# Altium PCB PCBROUTAGE.PcbDoc
Units mil, origin at the board's own origin, x right, y up, seen from the top; angles counter-clockwise.
Board outline 8785 x 6585 mil, 2 copper layers (Top Layer, Bottom Layer); 193 components, 168 nets, 704 pads, 0 vias.
Unrouted connection lines stored in the file: 371.
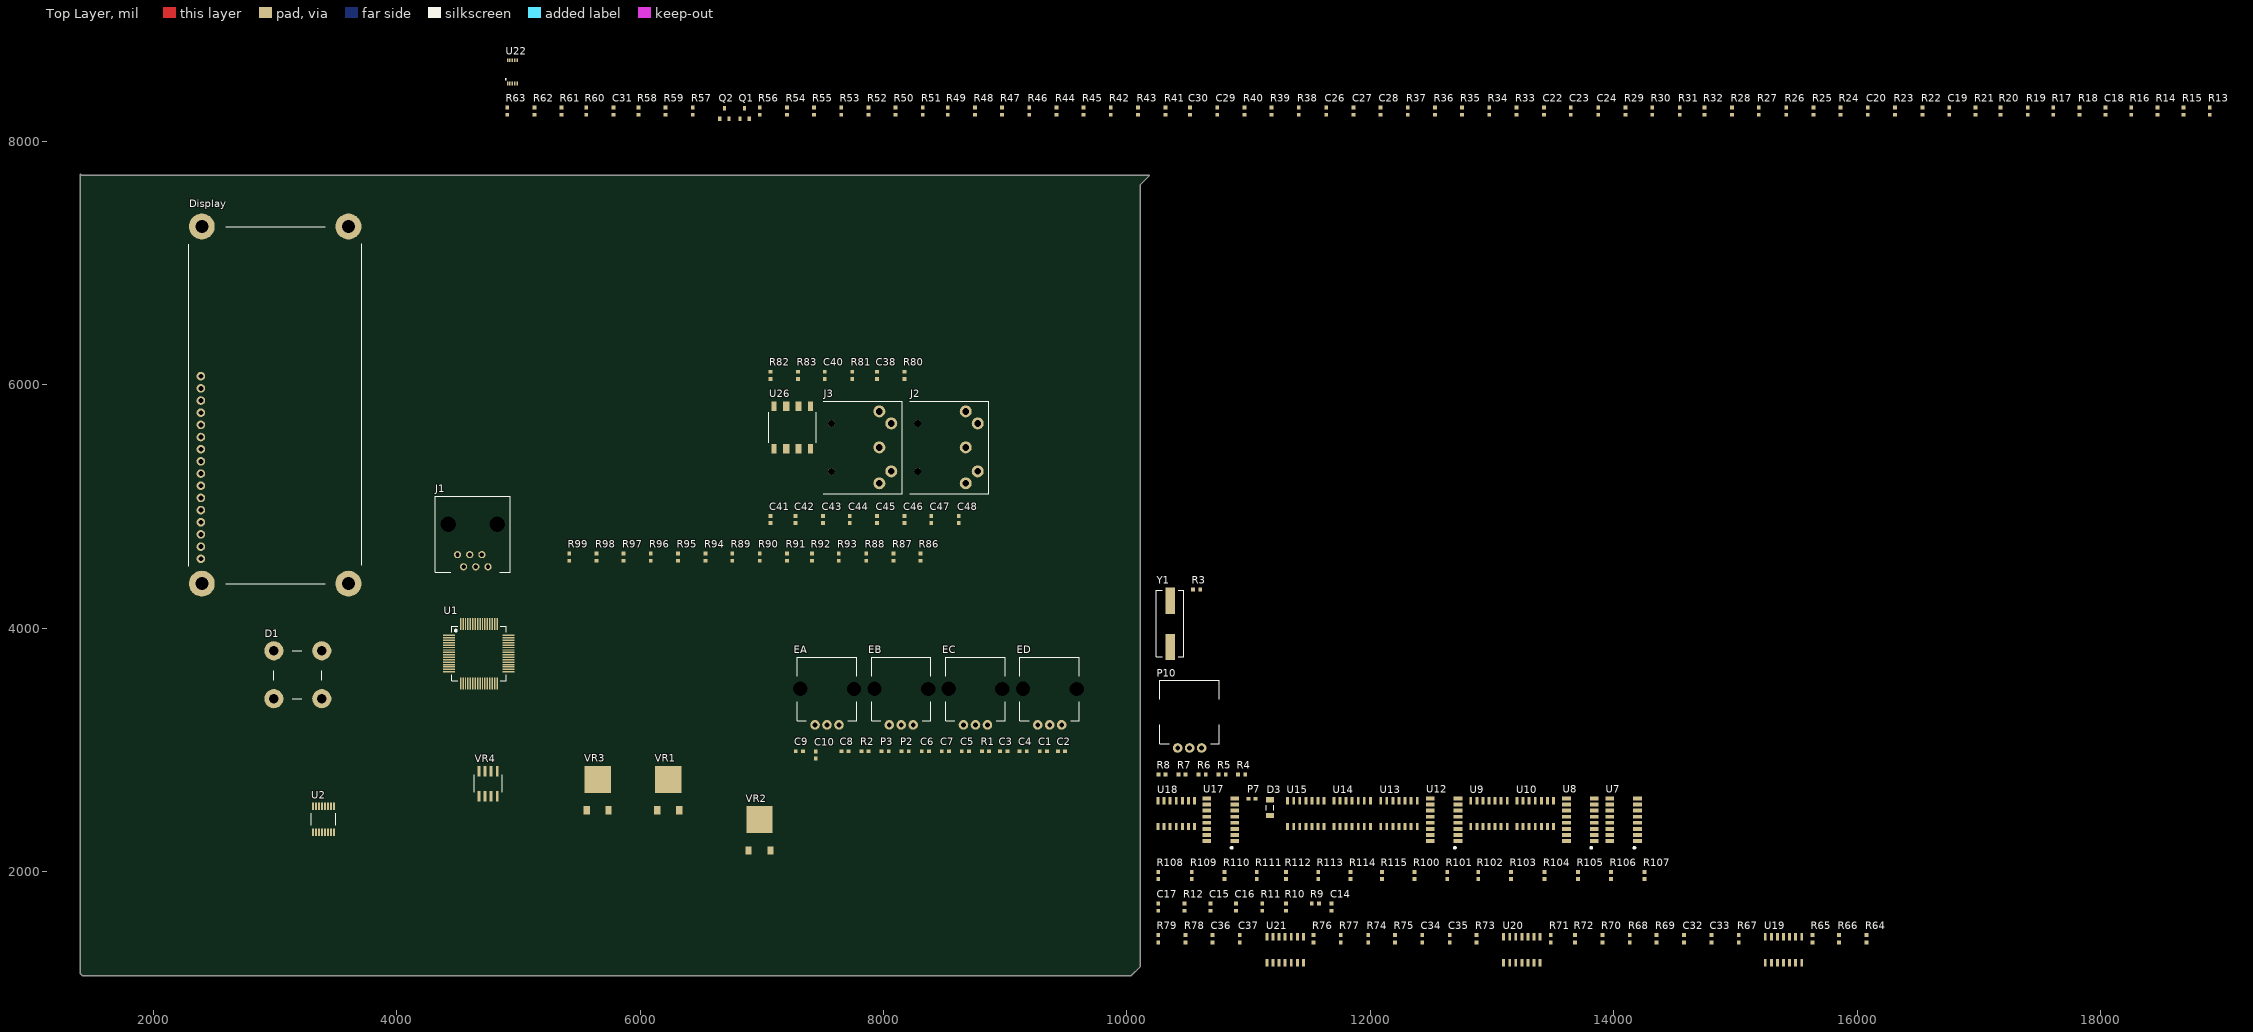
[diagram p0: Top Layer view]
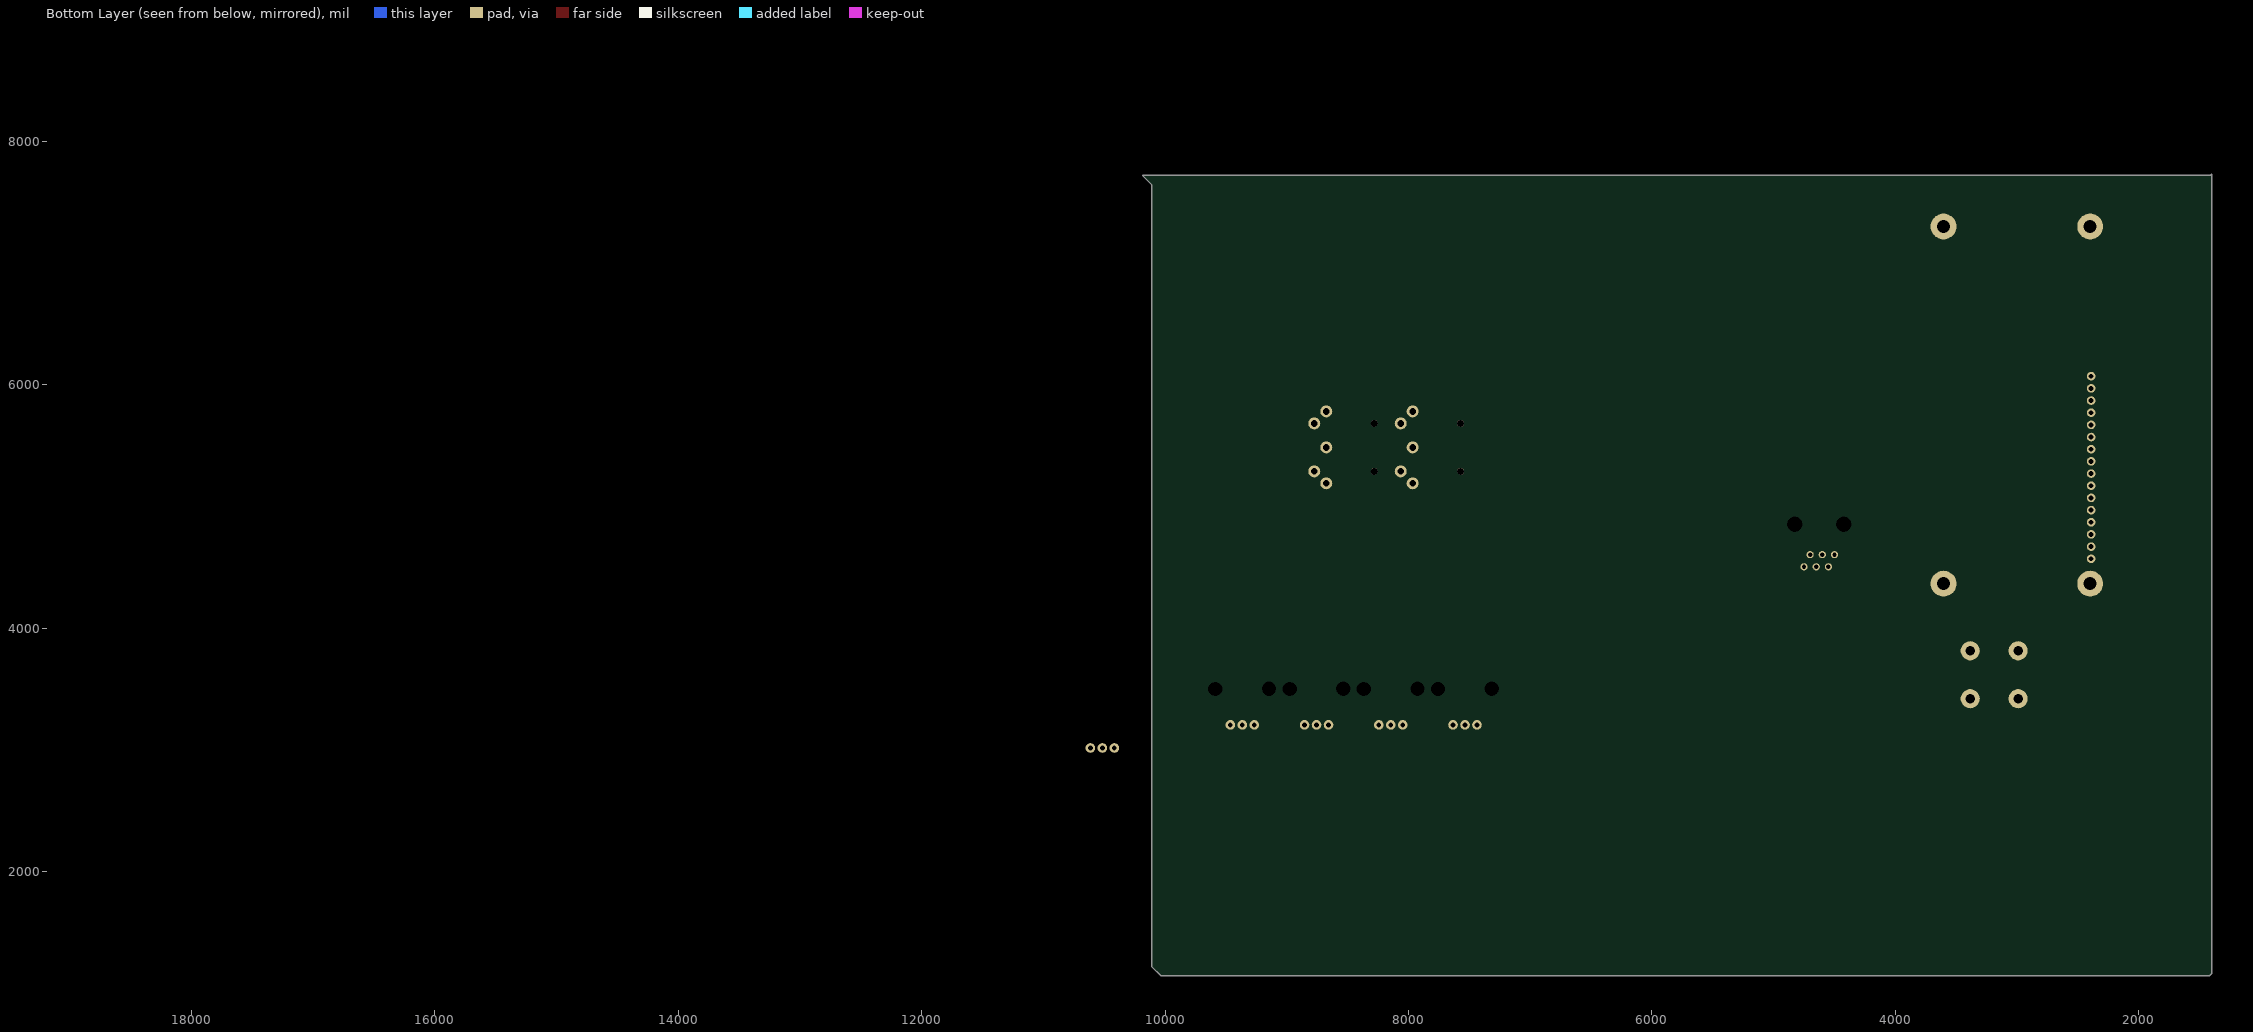
[diagram p1: Bottom Layer view, seen from below]

## Layer stack, top to bottom
Top Solder: solder mask 0.4, Solder Resist, Dk 3.5
Top Layer: signal copper 1.4
Dielectric 1: dielectric 12.6, FR-4, Dk 4.8
Bottom Layer: signal copper 1.4
Bottom Solder: solder mask 0.4, Solder Resist, Dk 3.5

## Board outline
1400,1160 1400,7730 1410,7720 10185,7720 10110,7645 10110,1220 10035,1145 1415,1145

## Design rules (kind name [scope] priority, off if disabled: settings)
Clearance [All] p1: gap=10
PolygonConnect [All] p1: connectstyle=Relief reliefconductorwidth=10 reliefentries=4 polygonreliefangle="90 Angle" airgapwidth=10
RoutingVias [All] p1: holewidth=28 width=50 viastyle="Through Hole" minholewidth=28 minwidth=50 maxholewidth=28 maxwidth=50
SolderMaskExpansion [All] p1: expansion=4
UnpouredPolygon [All] p1: allowunpoured=FALSE
Width [All] p1: maxlimit=10 minlimit=10 preferedwidth=10
29 further rules are at their usual default settings.

## Classes and differential pairs
component class Alimentation: C1 C2 C3 C4 C5 C6 C7 C8 C9 C10 D1 P1 P2 P3 R1 R2 VR1 VR2 VR3 VR4
component class Multiplexeur: C38 C39 C40 J4 P9 P10 R80 R81 R82 R83 R84 R85 U22 U23 U24 U25
component class Filtres: C18 C19 C20 C21 C22 C23 C24 C25 C26 C27 C28 C29 C30 C31 D3 P4 P5 P6 P7 Q1 Q2 Q3 Q4 R13 R14 R15 R16 R17 R18 R19 R20 R21 R22 R23 R24 R25 R26 R27 R28 R29 R30 R31 R32 R33 R34 R35 R36 R37 R38 R39 R40 R41 R42 R43 R44 R45 R46 R47 R48 R49 R50 R51 R52 R53 R54 R55 R56 R57 R58 R59 R60 R61 R62 R63 U3 U4 U5 U6 U7 U8 U9 U10 U11 U12 U13 U14 U15 U16 U17 U18
component class Encodeurs: C41 C42 C43 C44 C45 C46 C47 C48 EA EB EC ED R100 R101 R102 R103 R104 R105 R106 R107 R108 R109 R110 R111 R112 R113 R114 R115
component class Display: D4 D5 D6 D7 D8 D9 D10 D11 D12 Display P11 R86 R87 R88 R89 R90 R91 R92 R93 R94 R95 R96 R97 R98 R99 S2 S3 S4 S5 S6
component class DAC: C14 C15 C16 C17 R9 R10 R11 R12 U2
component class "Controle du Filtre": C32 C33 C34 C35 C36 C37 P8 R64 R65 R66 R67 R68 R69 R70 R71 R72 R73 R74 R75 R76 R77 R78 R79 U19 U20 U21
component class "MIDI IN": J2 J3 R4 R5 R6 R7 R8 U26
component class PIC: J1 R3 U1 Y1

## Components (designator, comment, footprint, x,y, rotation, side; value= is the part's Value field where it differs from the comment)
C1 "10uF" CAPC1608N 9250,2980 r0 top
C2 "100uF" CAPC1608N 9400,2980 r0 top
C3 "10uF" CAPC1608N 8925,2980 r0 top
C4 "100uF" CAPC1608N 9085,2980 r0 top
C5 "2200uF" CAPC1608N 8610,2980 r0 top
C6 "10uF" CAPC1608N 8280,2980 r0 top
C7 "100uF" CAPC1608N 8445,2980 r0 top
C8 "2200uF" CAPC1608N 7620,2980 r0 top
C9 "10uF" CAPC1608N 7245,2980 r0 top
C10 "100uF" CAPC1608N 7450,2895 r90 top
C14 "10uF" CAPC1608N 11690,1645 r90 top
C15 "10uF" CAPC1608N 10695,1645 r90 top
C16 "10uF" CAPC1608N 10905,1645 r90 top
C17 "0.1uF" CAPC1608N 10265,1645 r90 top
C18 "0.1uF" CAPC1608N 18050,8185 r90 top
C19 "0.1uF" CAPC1608N 16765,8185 r90 top
C20 "22pF" CAPC1608N 16095,8185 r90 top
C22 "0.1uF" CAPC1608N 13435,8185 r90 top
C23 "0.1uF" CAPC1608N 13655,8185 r90 top
C24 "0.1uF" CAPC1608N 13880,8185 r90 top
C26 "0.1uF" CAPC1608N 11645,8185 r90 top
C27 "0.1uF" CAPC1608N 11870,8185 r90 top
C28 "0.1uF" CAPC1608N 12090,8185 r90 top
C29 "220pF" CAPC1608N 10750,8185 r90 top
C30 "220pF" CAPC1608N 10525,8185 r90 top
C31 "100pF" CAPC1608N 5790,8185 r90 top
C32 "10uF" CAPC1608N 14585,1385 r90 top
C33 "10uF" CAPC1608N 14810,1385 r90 top
C34 "10uF" CAPC1608N 12435,1385 r90 top
C35 "10uF" CAPC1608N 12660,1385 r90 top
C36 "10uF" CAPC1608N 10710,1385 r90 top
C37 "10uF" CAPC1608N 10935,1385 r90 top
C38 "47pF" CAPC1608N 7955,6015 r90 top
C40 "4.7uF" CAPC1608N 7525,6015 r90 top
C41 "Cap" CAPC1608N 7080,4830 r90 top
C42 "Cap" CAPC1608N 7285,4830 r90 top
C43 "Cap" CAPC1608N 7510,4830 r90 top
C44 "Cap" CAPC1608N 7730,4830 r90 top
C45 "Cap" CAPC1608N 7955,4830 r90 top
C46 "Cap" CAPC1608N 8180,4830 r90 top
C47 "Cap" CAPC1608N 8400,4830 r90 top
C48 "Cap" CAPC1608N 8625,4830 r90 top
D1 "4x 1N4001" 1N4001 2990,3420 r0 top
D3 "1N914" 1N914 11310,2495 r90 top
Display "16x2 LCD" Display 2290,4260 r90 top
EA "EC12E" EC12E 7535,3205 r0 top
EB "EC12E" EC12E 8145,3205 r0 top
EC "EC12E" EC12E 8755,3205 r0 top
ED "EC12E" EC12E 9365,3205 r0 top
J1 "Program/Debug" RJ11 4195,4320 r0 top
J2 "Midi IN" "PCB DIN Socket" 8765,5105 r90 top
J3 "Midi THRU" "PCB DIN Socket" 8055,5105 r90 top
P2 "1k" CAPC1608N 8115,2980 r0 top
P3 "1k" CAPC1608N 7950,2980 r0 top
P7 "Hi freq Compensate" CAPC1608N 10965,2590 r0 top
P10 "Volume" EC12E 10515,3015 r0 top
Q1 "2N3906" 2N3906 6720,8125 r0 top
Q2 "2N3906" 2N3906 6555,8125 r0 top
R1 "120" CAPC1608N 8775,2980 r0 top
R2 "240" CAPC1608N 7785,2980 r0 top
R3 "10k" CAPC1608N 10510,4310 r0 top
R4 "Res1" CAPC1608N 10880,2790 r0 top
R5 "Res1" CAPC1608N 10720,2790 r0 top
R6 "330" CAPC1608N 10555,2790 r0 top
R7 "Res1" CAPC1608N 10390,2790 r0 top
R8 "1k" CAPC1608N 10225,2790 r0 top
R9 "100" CAPC1608N 11485,1730 r0 top
R10 "100" CAPC1608N 11315,1645 r90 top
R11 "100" CAPC1608N 11120,1645 r90 top
R12 "100" CAPC1608N 10480,1645 r90 top
R13 "300k" CAPC1608N 18905,8185 r90 top
R14 "2k" CAPC1608N 18475,8185 r90 top
R15 "2k" CAPC1608N 18690,8185 r90 top
R16 "200k" CAPC1608N 18260,8185 r90 top
R17 "100k" CAPC1608N 17620,8185 r90 top
R18 "100k" CAPC1608N 17835,8185 r90 top
R19 "49.9k" CAPC1608N 17410,8185 r90 top
R20 "150k" CAPC1608N 17185,8185 r90 top
R21 "4.7M" CAPC1608N 16980,8185 r90 top
R22 "2k" CAPC1608N 16545,8185 r90 top
R23 "180k" CAPC1608N 16320,8185 r90 top
R24 "4.7M" CAPC1608N 15870,8185 r90 top
R25 "150k" CAPC1608N 15650,8185 r90 top
R26 "39k" CAPC1608N 15425,8185 r90 top
R27 "300k" CAPC1608N 15200,8185 r90 top
R28 "49.9k" CAPC1608N 14980,8185 r90 top
R29 "39k" CAPC1608N 14105,8185 r90 top
R30 "100" CAPC1608N 14325,8185 r90 top
R31 "100" CAPC1608N 14550,8185 r90 top
R32 "43k" CAPC1608N 14755,8185 r90 top
R33 "150k" CAPC1608N 13210,8185 r90 top
R34 "30k" CAPC1608N 12985,8185 r90 top
R35 "100k" CAPC1608N 12760,8185 r90 top
R36 "100k" CAPC1608N 12540,8185 r90 top
R37 "20k" CAPC1608N 12315,8185 r90 top
R38 "20k" CAPC1608N 11420,8185 r90 top
R39 "4.7k" CAPC1608N 11195,8185 r90 top
R40 "100" CAPC1608N 10975,8185 r90 top
R41 "30k" CAPC1608N 10325,8185 r90 top
R42 "50k" CAPC1608N 9875,8185 r90 top
R43 "50k" CAPC1608N 10100,8185 r90 top
R44 "100k" CAPC1608N 9430,8185 r90 top
R45 "120k" CAPC1608N 9650,8185 r90 top
R46 "30k" CAPC1608N 9205,8185 r90 top
R47 "100k" CAPC1608N 8980,8185 r90 top
R48 "100k" CAPC1608N 8760,8185 r90 top
R49 "100k" CAPC1608N 8535,8185 r90 top
R50 "7.5k" CAPC1608N 8105,8185 r90 top
R51 "7.5k" CAPC1608N 8330,8185 r90 top
R52 "2k" CAPC1608N 7885,8185 r90 top
R53 "100k" CAPC1608N 7660,8185 r90 top
R54 "100k" CAPC1608N 7215,8185 r90 top
R55 "30k" CAPC1608N 7435,8185 r90 top
R56 "1M" CAPC1608N 6990,8185 r90 top
R57 "100k" CAPC1608N 6440,8185 r90 top
R58 "33k" CAPC1608N 5995,8185 r90 top
R59 "33k" CAPC1608N 6215,8185 r90 top
R60 "10k" CAPC1608N 5565,8185 r90 top
R61 "100k" CAPC1608N 5360,8185 r90 top
R62 "475" CAPC1608N 5140,8185 r90 top
R63 "10k" CAPC1608N 4915,8185 r90 top
R64 "18K" CAPC1608N 16085,1385 r90 top
R65 "2k" CAPC1608N 15640,1385 r90 top
R66 "2k" CAPC1608N 15860,1385 r90 top
R67 "3.3k" CAPC1608N 15035,1385 r90 top
R68 "10k" CAPC1608N 14140,1385 r90 top
R69 "10k" CAPC1608N 14360,1385 r90 top
R70 "18K" CAPC1608N 13915,1385 r90 top
R71 "2k" CAPC1608N 13490,1385 r90 top
R72 "2k" CAPC1608N 13690,1385 r90 top
R73 "3.3k" CAPC1608N 12880,1385 r90 top
R74 "10k" CAPC1608N 11990,1385 r90 top
R75 "10k" CAPC1608N 12210,1385 r90 top
R76 "2k" CAPC1608N 11540,1385 r90 top
R77 "2k" CAPC1608N 11765,1385 r90 top
R78 "10k" CAPC1608N 10490,1385 r90 top
R79 "10k" CAPC1608N 10265,1385 r90 top
R80 "50k" CAPC1608N 8180,6015 r90 top
R81 "10k" CAPC1608N 7750,6015 r90 top
R82 "330" CAPC1608N 7080,6015 r90 top
R83 "5k" CAPC1608N 7305,6015 r90 top
R86 "220" CAPC1608N 8310,4520 r90 top
R87 "220" CAPC1608N 8090,4520 r90 top
R88 "220" CAPC1608N 7865,4520 r90 top
R89 "10K" CAPC1608N 6765,4520 r90 top
R90 "10K" CAPC1608N 6990,4520 r90 top
R91 "10K" CAPC1608N 7215,4520 r90 top
R92 "10K" CAPC1608N 7420,4520 r90 top
R93 "10K" CAPC1608N 7640,4520 r90 top
R94 "220" CAPC1608N 6545,4520 r90 top
R95 "220" CAPC1608N 6320,4520 r90 top
R96 "220" CAPC1608N 6095,4520 r90 top
R97 "220" CAPC1608N 5870,4520 r90 top
R98 "220" CAPC1608N 5650,4520 r90 top
R99 "220" CAPC1608N 5425,4520 r90 top
R100 "10K" CAPC1608N 12370,1905 r90 top
R101 "10K" CAPC1608N 12640,1905 r90 top
R102 "10K" CAPC1608N 12895,1905 r90 top
R103 "10K" CAPC1608N 13165,1905 r90 top
R104 "10K" CAPC1608N 13440,1905 r90 top
R105 "10K" CAPC1608N 13715,1905 r90 top
R106 "10K" CAPC1608N 13985,1905 r90 top
R107 "10K" CAPC1608N 14260,1905 r90 top
R108 "330" CAPC1608N 10265,1905 r90 top
R109 "330" CAPC1608N 10540,1905 r90 top
R110 "330" CAPC1608N 10810,1905 r90 top
R111 "330" CAPC1608N 11075,1905 r90 top
R112 "330" CAPC1608N 11315,1905 r90 top
R113 "330" CAPC1608N 11580,1905 r90 top
R114 "330" CAPC1608N 11845,1905 r90 top
R115 "330" CAPC1608N 12105,1905 r90 top
U1 "PIC32MX575F512H" PIC32 4310,3810 r0 top
U2 "PCM1781" PCM1781 3415,2480 r0 top
U7 "LM13700" LM13700 14220,2175 r90 top
U8 "LM13700" LM13700 13865,2175 r90 top
U9 "TL082" TL084 12890,2330 r0 top
U10 "TL082" TL084 13270,2330 r0 top
U12 "LM13700" LM13700 12745,2175 r90 top
U13 "TL082" TL084 12150,2330 r0 top
U14 "TL082" TL084 11765,2330 r0 top
U15 "TL082" TL084 11385,2330 r0 top
U17 "LM13700" LM13700 10910,2175 r90 top
U18 "TL082" TL084 10320,2330 r0 top
U19 "TL084" TL084 15310,1210 r0 top
U20 "TL084" TL084 13160,1210 r0 top
U21 "TL084" TL084 11215,1210 r0 top
U22 "ADG704" ADG704 4845,8410 r0 top
U26 "6N139" 6N139 7055,5415 r0 top
VR1 "LM1117-3.3" LM1117 6110,2880 r0 top
VR2 "LM1117-5.0" LM1117 6860,2550 r0 top
VR3 "LM1117-ADJ" LM1117 5530,2880 r0 top
VR4 "LM337L" LM337L 4615,2525 r0 top
Y1 "12.288 MHz" "HC49/4H SMX CRYSTAL" 10355,4035 r90 top

## Footprints (in the part's own frame and the unit in brackets; to place one, negate y for a bottom-side part, rotate by r counter-clockwise, add the part's x,y. Pads: shape width x height; smd on the part's side, far side on the other; paste and mask are expansions set on the pad)
1N914 [mm] "Diode"
  rect 1.1x1.65 smd: 1(-0.889,3.396) 2(2.411,3.396)
  silkscreen extent 0.25,2.67 1.27,4.19
1N4001 [mm] "Diode"
  round 4 hole 2: 1(0,10) 2(10,10) 3(10,0) 4(0,0)
  silkscreen extent 0,0 10,10
2N3906 [mm]
  rect 0.7x1 smd: 1(2.54,1.524) 1(3.485,3.74) 1(4.44,1.524)
6N139 [mil] "Optocoupleur"
  rect 40x78.74 smd: 1(45,60) 4(345,60) 5(345,409.13) 8(45,409.13)
  rect 50x78.74 smd: 2(145,60) 3(245,60) 6(245,409.13) 7(145,409.13)
  silkscreen extent 0,110 390,360
ADG704 [mm] "Multiplexeur"
  rect 0.3x0.8 smd mask+0.05: 1(1.651,1.651) 2(2.151,1.651) 3(2.659,1.651) 4(3.159,1.651) 5(3.675,1.651) 6(3.675,6.498) 7(3.159,6.498) 8(2.659,6.498) 9(2.151,6.498) 10(1.651,6.498)
  silkscreen extent 1.17,2.44 1.37,2.64
CAPC1608N [mil]
  rect 31.5x31.5 smd: 1(33,8) 2(92,8)
Display [mm]
  round 5.4 hole 2.7: 0(2.674,-2.733) 0(2.674,-33.34) 0(77.223,-33.34) 0(77.223,-2.733)
  round 1.8 hole 1: 1(7.874,-2.54) 2(10.414,-2.54) 3(12.954,-2.54) 4(15.494,-2.54) 5(18.034,-2.54) 6(20.574,-2.54) 7(23.114,-2.54) 8(25.654,-2.54) 9(28.194,-2.54) 10(30.734,-2.54) 11(33.274,-2.54) 12(35.814,-2.54) 13(38.354,-2.54) 14(40.894,-2.54) 15(43.434,-2.54) 16(45.974,-2.54)
  silkscreen extent 2.67,-36.13 77.22,0
EC12E [mm] "Encodeur"
  round 0 hole 3 mask+0: 0(-5.584,7.5) 0(5.628,7.493)
  round 2 hole 1 mask+0: A(-2.5,0) B(0,0) C(2.5,0)
  silkscreen extent -6.2,0.89 6.2,14.09
"HC49/4H SMX CRYSTAL" [mm]
  rect 5.5x2 smd: 1(-4.826,0) 2(4.826,0)
  silkscreen extent -6.86,-2.86 7.04,2.94
LM337L [mm]
  round 0.4 on Top Overlay: 0(1.27,4.064)
  rect 0.6x2.2 smd mask+0.1: 1(1.524,2.413) 2(2.794,2.413) 3(4.064,2.413) 4(5.334,2.413) 5(5.334,7.613) 6(4.064,7.613) 7(2.794,7.613) 8(1.524,7.613)
  silkscreen extent 0.51,3.17 6.35,6.86
LM1117 [mm] "Linear regulator"
  rect 1.3x1.7 smd: 1(0.764,-9.57) 3(5.334,-9.57)
  rect 5.5x5.7 smd: 2(3.049,-3.13)
LM13700 [mm]
  rect 0.8x1.8 smd: 1(1.905,0.635) 2(3.175,0.635) 3(4.445,0.635) 4(5.715,0.635) 5(6.985,0.635) 6(8.255,0.635) 7(9.525,0.635) 8(10.795,0.635) 9(10.795,6.435) 10(9.525,6.435) 11(8.255,6.435) 12(6.985,6.435) 13(5.715,6.435) 14(4.445,6.435) 15(3.175,6.435) 16(1.905,6.435)
  silkscreen extent 0.31,1.07 0.71,1.47
"PCB DIN Socket" [mm] "Midi"
  round 1.4 hole 1.5 mask+0: 0(4.652,12.286) 0(14.652,12.286)
  round 2.5 hole 1.4: 1(9.652,2.286) 2(17.159,2.286) 3(2.159,2.286) 4(14.652,-0.214) 5(4.652,-0.214)
  silkscreen extent 0,-2.54 19.3,13.97
PCM1781 [mm] "DAC"
  rect 0.4x1.6 smd mask+0.05: 1(-2.667,-4.003) 2(-2.032,-4.003) 3(-1.397,-4.003) 4(-0.762,-4.003) 5(-0.127,-4.003) 6(0.508,-4.003) 7(1.143,-4.003) 8(1.778,-4.003) 9(1.778,1.397) 10(1.143,1.397) 11(0.508,1.397) 12(-0.127,1.397) 13(-0.762,1.397) 14(-1.397,1.397) 15(-2.032,1.397) 16(-2.667,1.397)
  round 0.4 on Top Overlay: 1(-2.413,-2.286)
  silkscreen extent -3.05,-2.54 2.16,0
PIC32 [mm] "PIC32MX575F512H"
  rect 2.5x0.3 smd paste+0 mask+0.05: 1(3.056,3.302) 2(3.056,2.802) 3(3.056,2.294) 4(3.056,1.794) 5(3.056,1.278) 6(3.056,0.778) 7(3.056,0.262) 8(3.056,-0.238) 9(3.056,-0.754) 10(3.056,-1.254) 11(3.056,-1.762) 12(3.056,-2.262) 13(3.056,-2.778) 14(3.056,-3.278) 15(3.056,-3.794) 16(3.056,-4.294) 33(15.456,-4.294) 34(15.456,-3.794) 35(15.456,-3.278) 36(15.456,-2.778) 37(15.456,-2.262) 38(15.456,-1.762) 39(15.456,-1.254) 40(15.456,-0.754) 41(15.456,-0.238) 42(15.456,0.262) 43(15.456,0.778) 44(15.456,1.278) 45(15.456,1.794) 46(15.456,2.294) 47(15.456,2.802) 48(15.456,3.302)
  rect 0.3x2.5 smd paste+0 mask+0.05: 17(5.461,-6.693) 18(5.961,-6.693) 19(6.469,-6.693) 20(6.969,-6.693) 21(7.485,-6.693) 22(7.985,-6.693) 23(8.501,-6.693) 24(9.001,-6.693) 25(9.517,-6.693) 26(10.017,-6.693) 27(10.525,-6.693) 28(11.025,-6.693) 29(11.541,-6.693) 30(12.041,-6.693) 31(12.557,-6.693) 32(13.057,-6.693) 49(13.057,5.707) 50(12.557,5.707) 51(12.041,5.707) 52(11.541,5.707) 53(11.025,5.707) 54(10.525,5.707) 55(10.017,5.707) 56(9.517,5.707) 57(9.001,5.707) 58(8.501,5.707) 59(7.985,5.707) 60(7.485,5.707) 61(6.969,5.707) 62(6.469,5.707) 63(5.961,5.707) 64(5.461,5.707)
  silkscreen extent 3.56,-6.19 14.96,5.21
RJ11 [mm] "RJ11 Socket"
  round 0 hole 3.25 mask+0: 0(5.818,13.556) 0(15.978,13.556)
  round 1.5 hole 0.9: 1(14.073,4.666) 2(12.803,7.206) 3(11.533,4.666) 4(10.263,7.206) 5(8.993,4.666) 6(7.723,7.206)
  silkscreen extent 3.05,3.56 18.75,19.44
TL084 [mm] "Ampli-op"
  rect 0.6x1.55 smd: 1(-1.651,1.016) 1(-1.651,6.416) 1(2.159,1.016) 1(2.159,6.416) 2(-0.381,1.016) 2(-0.381,6.416) 2(3.429,1.016) 2(3.429,6.416) 3(0.889,1.016) 3(0.889,6.416) 3(4.699,1.016) 3(4.699,6.416) 4(5.969,1.016) 4(5.969,6.416)

## Part data
C1 C2 C3 C4 C6 C7 C9 C10: library part Cap2, "Capacitor"
C5 C8 C14 C15 C16: library part "Cap Pol1", "Polarized Capacitor (Radial)"
C17 C18 C19 C20 C22 C23 C24 C26 C27 C28 C29 C30 C31 C32 C33 C34 C35 C36 C37 C38 C40: library part "Cap Semi", "Capacitor (Semiconductor SIM Model)"
C41 C42 C43 C44 C45 C46 C47 C48: "Capacitor"
D1: library part Bridge1, "Full Wave Diode Bridge"
D3: library part "Diode 1N4001", "1 Amp General Purpose Rectifier"
Display: library part Display
J1: library part "Header 6H", "Header, 6-Pin, Right Angle"
J2 J3: library part "Header 5", "DIN 5 Pins"
P2 P3 P7: library part "Res Adj1", "Variable Resistor"
P10: library part RPot, "Potentiometer"
Q1 Q2: "PNP General Purpose Amplifier"
R1 R2 R9 R10 R11 R12 R13 R14 R15 R16 R17 R18 R19 R20 R21 R22 R23 R24 R25 R26 R27 R28 R29 R30 R31 R32 R33 R34 R35 R36 R37 R38 R39 R40 R41 R42 R43 R44 R45 R46 R47 R48 R49 R50 R51 R52 R53 R54 R55 R56 R57 R58 R59 R60 R61 R62 R63 R64 R65 R66 R67 R68 R69 R70 R71 R72 R73 R74 R75 R76 R77 R78 R79 R80 R81 R82 R83: library part Res3, "Resistor"
R3 R6 R8 R86 R87 R88 R89 R90 R91 R92 R93 R94 R95 R96 R97 R98 R99 R100 R101 R102 R103 R104 R105 R106 R107 R108 R109 R110 R111 R112 R113 R114 R115: library part Res1, "Resistor"
R4 R5 R7: "Resistor"
U1: library part "PIC32 MX575F512H"
U2: library part "PCM1781 DAC"
VR1 VR2 VR3 VR4: library part "Volt Reg", "Voltage Regulator"
Y1: library part XTAL, "Crystal Oscillator"

## Nets (pads, with @x,y where several pads share a name; then routed paths per layer and width w, separated by ;. In a path a pad name is that pad's centre, name@x,y a point inside that pad or via, vN(x,y) a via of type N, cw(c..) or ccw(c..) an arc to the next point about the centre after c; other vN are vias at no path point)
3,3V: J1.2 R3.2 U1.10 U1.19 U1.26 U1.38 U1.57
+3.3V: C2.1 R89.2 R90.2 R91.2 R92.2 R93.2 VR1.3
+5V: C4.1 C16.1 C17.2 Display.2 Display.16 R4.2 R6.2 U2.11 U22.5 U22.6 VR2.3
+9V: C7.1 C22.2 C23.2 C24.2 R1.2 R37.1 R38.1 R43.2 R56.1 R59.2 U19.4 U20.4 U21.4 VR3.3
-9V: C10.2 C26.1 C27.1 C28.1 R2.1 R29.2 R32.2 R39.1 R42.1 R54.1 R58.1 R64.1 R70.1 U8.6 U9.4 U12.6 U13.4 U15.4 VR4.3
GND: C1.2 C2.2 C3.2 C4.2 C5.2 C6.2 C7.2 C8.1 C9.1 C10.1 C22.1 C26.2 C29.1 C30.1 C32.1 C33.1 C34.1 C35.1 C36.1 C37.1 C41.1 C42.1 C43.1 C44.1 C45.1 C46.1 C47.1 C48.1 Display.1 Display.5 J1.3 J3.2 P2.1 P3.2 Q1.1 Q2.1 R8.1 R21.2 R23.2 R24.2 R26.2 R27.1 R28.1 R30.2 R31.2 R40.2 R41.2 R55.2 R62.2 R68.2 R74.2 R79.2 U1.9 U1.20 U1.25 U1.41 U7.3 U8.3 U12.3 U13.3 U15.3 U17.3 U17.4 U22.3 VR1.2 VR2.2
NetC1_1: C1.1 C3.1 C5.1 C6.1 D1.1 VR1.1 VR2.1 VR3.1
NetC8_2: C8.2 C9.2 D1.3 VR4.1
NetC11_2: U1.40 Y1.2
NetC12_2: U1.39 Y1.1
NetC13_2: U1.56
NetC14_1: C14.1 U2.15
NetC14_2: C14.2 R16.1 U22.2
NetC15_1: C15.1 U2.13
NetC18_1: C18.1 R18.2 R35.2
NetC18_2: C18.2 R21.1
NetC19_1: C19.1 R19.2 R36.1 U9.1 U9.2
NetC19_2: C19.2 R24.1
NetC20_1: C20.1 R20.1 R23.1
NetC20_2: C20.2 R15.1 R20.2 R28.2
NetC23_1: C23.1 C27.2
NetC24_1: C24.1 C28.2
NetC29_2: C29.2 U8.5 U9.3
NetC30_2: C30.2 U7.5
NetC31_1: C31.1 R56.2
NetC31_2: C31.2 P7.1 R63.1
NetC32_2: C32.2 R65.2 R66.1
NetC33_2: C33.2 R66.2 R67.1
NetC34_2: C34.2 R71.2 R72.1
NetC35_2: C35.2 R72.2 R73.1
NetC36_2: C36.2 R76.2 R77.1
NetC37_2: C37.2 R77.2 U21.2
NetC38_1: C38.1
NetC38_2: C38.2 R82.2
NetC39_1: 
NetC40_1: C40.1 R80.1 R82.1
NetC40_2: C40.2 R83.1
NetC41_2: C41.2 R100.2 R108.2
NetC42_2: C42.2 R101.1 R109.2
NetC43_2: C43.2 R102.2 R110.2
NetC44_2: C44.2 R103.1 R111.2
NetC45_2: C45.2 R104.2 R112.2
NetC46_2: C46.2 R105.1 R113.2
NetC47_2: C47.2 R106.2 R114.2
NetC48_2: C48.2 R107.1 R115.2
NetD1_2: D1.2
NetD1_4: D1.4
NetD2_1: J2.5
NetD2_2: R5.2
NetD3_1: D3.1
NetD3_2: D3.2 R60.2
NetD4_1: R86.2
NetD5_1: R87.2
NetD6_1: R88.2
NetD7_1: R94.2
NetD8_1: R95.2
NetD9_1: R96.2
NetD10_1: R97.2
NetD11_1: R98.2
NetD12_1: R99.2
NetDisplay_3: Display.3
NetDisplay_4: Display.4 U1.29
NetDisplay_6: Display.6 U1.30
NetDisplay_7: Display.7 U1.23
NetDisplay_8: Display.8 U1.24
NetDisplay_9: Display.9 U1.27
NetDisplay_10: Display.10 U1.28
NetDisplay_15: Display.15
NetJ1_1: J1.1 R3.1 U1.7
NetJ1_4: J1.4 U1.16
NetJ1_5: J1.5 U1.15
NetJ2_4: J2.4 R5.1
NetJ3_4: J3.4 R4.1
NetJ3_5: J3.5 R7.1
NetJ4_2: 
NetJ4_3: 
NetJ4_4: R81.2
NetJ4_5: 
NetP2_2: P2.2 R1.1 VR3.2
NetP3_1: P3.1 R2.2 VR4.2
NetP4_1: R43.1
NetP4_2: R42.2
NetP4_3: R44.1
NetP5_1: R52.2 U15.1
NetP5_2: R62.1
NetP6_1: R59.1
NetP6_2: R58.2
NetP6_3: R61.1
NetP7_2: P7.2 R60.1
NetP8_1: R79.1
NetP8_2: R78.2 U21.3
NetP9_2: R80.2
NetP10_2: U22.8
NetQ1_2: 
NetQ1_3: R50.1
NetQ2_3: R51.1
NetQ3_1: R63.2
NetR6_1: R6.1 R7.2 U1.21
NetR8_2: R8.2
NetR9_1: R9.1 U1.51
NetR9_2: R9.2 U2.5
NetR10_1: R10.1 U1.6
NetR10_2: R10.2 U2.6
NetR11_1: R11.1 U1.4
NetR11_2: R11.2 U2.7
NetR12_1: R12.1 U1.52
NetR12_2: R12.2 U2.8
NetR13_1: R13.1 R16.2 R19.1
NetR13_2: R13.2 R14.1 R17.1
NetR14_2: R14.2 U22.9
NetR15_2: R15.2 U22.7
NetR17_2: R17.2 R18.1 R31.1 R32.1 R33.1 U7.4
NetR22_1: R22.1 R25.2
NetR22_2: R22.2 U22.4
NetR25_1: R25.1 R26.1
NetR27_2: R27.2 R34.1
NetR29_1: R29.1 R30.1 R35.1 R36.2 U8.4
NetR33_2: R33.2 R39.2
NetR34_2: R34.2 R40.1 U12.4
NetR37_2: R37.2 U7.2
NetR38_2: R38.2 U8.2
NetR41_1: R41.1 U12.5
NetR44_2: R44.2 R45.1 R48.2 U13.2
NetR45_2: R45.2 R49.1 U13.1
NetR46_1: R46.1 U12.1
NetR46_2: R46.2 R47.2
NetR47_1: R47.1 R49.2
NetR48_1: R48.1 R75.1 U20.1
NetR50_2: R50.2 U8.1
NetR51_2: R51.2 U7.1
NetR52_1: R52.1 R53.2 R57.2 R61.2 U15.2
NetR53_1: R53.1 R78.1 U21.1
NetR54_2: R54.2 R55.1
NetR57_1: R57.1 R69.1 U19.1
NetR64_2: R64.2 R67.2 U19.2
NetR65_1: R65.1 U1.46
NetR68_1: R68.1 R69.2 U19.3
NetR70_2: R70.2 R73.2 U20.2
NetR71_1: R71.1 U1.49
NetR74_1: R74.1 R75.2 U20.3
NetR76_1: R76.1 U1.50
NetR81_1: R81.1 R83.2
NetR84_2: 
NetR86_1: R86.1 U1.53
NetR87_1: R87.1 U1.54
NetR88_1: R88.1 U1.55
NetR89_1: R89.1 U1.18
NetR90_1: R90.1 U1.11
NetR91_1: R91.1 U1.1
NetR92_1: R92.1 U1.60
NetR93_1: R93.1 U1.59
NetR94_1: R94.1 U1.58
NetR95_1: R95.1 U1.2
NetR96_1: R96.1 U1.3
NetR97_1: R97.1 U1.5
NetR98_1: R98.1 U1.8
NetR99_1: R99.1 U1.22
NetR108_1: R108.1 U1.61
NetR109_1: R109.1 U1.62
NetR110_1: R110.1 U1.63
NetR111_1: R111.1 U1.64
NetR112_1: R112.1 U1.12
NetR113_1: R113.1 U1.13
NetR114_1: R114.1 U1.14
NetR115_1: R115.1 U1.17
NetU1_47: U1.47 U22.10
NetU1_48: U1.48 U22.1
VCC: R100.1 R101.2 R102.1 R103.2 R104.1 R105.2 R106.1 R107.2
pads on no net: C15.2 C16.2 C17.1 Display.0 Display.11 Display.12 Display.13 Display.14 EA.0 EA.A EA.B EA.C EB.0 EB.A EB.B EB.C EC.0 EC.A EC.B EC.C ED.0 ED.A ED.B ED.C J1.0 J1.6 J2.0 J2.1 J2.2 J2.3 J3.0 J3.1 J3.3 P10.0 P10.A P10.B P10.C U1.31 U1.32 U1.33 U1.34 U1.35 U1.36 U1.37 U1.42 U1.43 U1.44 U1.45 U2.1 U2.2 U2.3 U2.4 U2.9 U2.10 U2.12 U2.14 U2.16 U7.6 U7.7 U7.8 U7.9 U7.10 U7.11 U7.12 U7.13 U7.14 U7.15 U7.16 U8.7 U8.8 U8.9 U8.10 U8.11 U8.12 U8.13 U8.14 U8.15 U8.16 U10.1 U10.2 U10.3 U10.4 U12.2 U12.7 U12.8 U12.9 U12.10 U12.11 U12.12 U12.13 U12.14 U12.15 U12.16 U14.1 U14.2 U14.3 U14.4 U17.1 U17.2 U17.5 U17.6 U17.7 U17.8 U17.9 U17.10 U17.11 U17.12 U17.13 U17.14 U17.15 U17.16 U18.1 U18.2 U18.3 U18.4 U26.1 U26.2 U26.3 U26.4 U26.5 U26.6 U26.7 U26.8 VR4.0 VR4.4 VR4.5 VR4.6 VR4.7 VR4.8